# EAGLE board power-breakout-r1 (EAGLE 9.1.3)
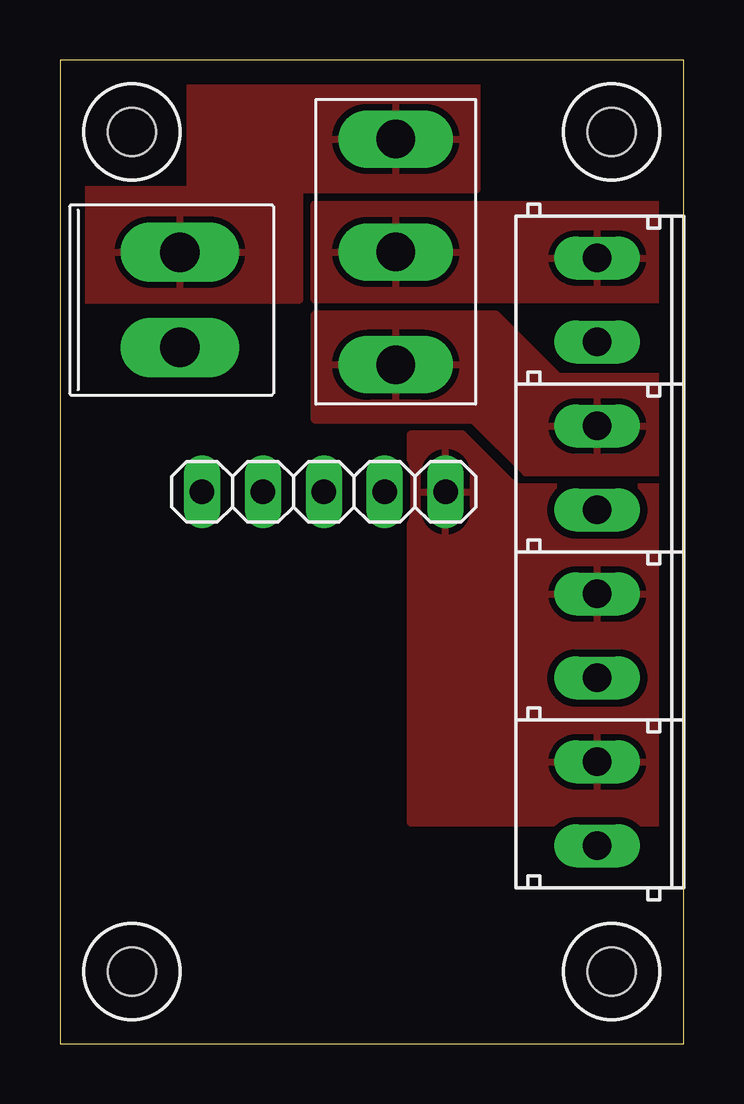
[diagram p0: board, top side]
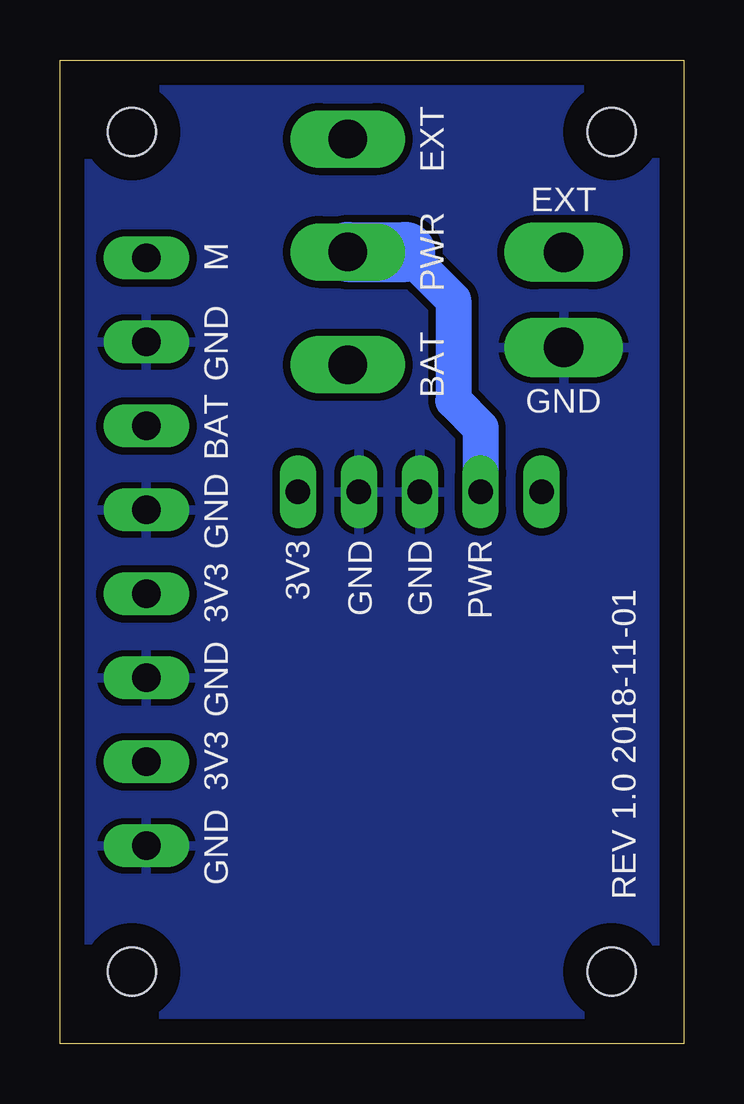
[diagram p1: board, bottom side, seen from below]

Size 26 x 41 mm. Coordinates in mm from the lower left corner, seen from the top.
Outline: 0,0 26,0 26,41 0,41 0,0
Copper layers (1*16): Top 0.035mm / dielectric 1.5mm / Bottom 0.035mm
Design rules "default": minimum track width 6mil, minimum drill 0.35mm, track to track 6mil, track to pad 6mil, pad to pad 6mil, via to via 6mil, smd to smd 6mil, copper to edge 40mil, drill to drill 6mil, minimum pad ring 10mil, minimum via ring 8mil, stop-mask expansion 4mil, vias tented up to drill 0mil, thermal gap 10mil
Holes 2 mm at 3,3 23,3 23,38 3,38

## Footprints (pad centres in the part's own frame; a part is rotated, then mirrored left to right if it is on the bottom)
1X05-CONNECTOR = drill 1.016 long: 1 -5.08,0; 2 -2.54,0; 3 0,0; 4 2.54,0; 5 5.08,0
WURTH_691103110002 = drill 1.2 long: 1 -1.75,-3.6; 2 1.75,-3.6
2_PINS,0.156_PITCH = drill 1.65 long: 1 0,1.98; 2 0,-1.98
APEM_GH39P0 = drill 1.6 long: P$1 0,4.7; P$2 0,0; P$3 0,-4.7

## Placement (x,y rotation side)
JP_3V3_REG  CON-1X5  [1X05-CONNECTOR]  11,23 0 top
JPWR_3V3_A  WURTH_691103110002  [WURTH_691103110002]  26,17 270 top
JPWR_3V3_B  WURTH_691103110002  [WURTH_691103110002]  26,10 270 top
JPWR_BATTERY  WURTH_691103110002  [WURTH_691103110002]  26,24 270 top
JPWR_EXTERNAL  JST_B2P-VH_1X2_10A  [2_PINS,0.156_PITCH]  5,31 0 top
JPWR_MOTORS  WURTH_691103110002  [WURTH_691103110002]  26,31 270 top
SW  APEM_GH39P0  [APEM_GH39P0]  14,33 180 top

## Library data of the parts
JP_3V3_REG = pin-headers
JPWR_3V3_A JPWR_3V3_B JPWR_BATTERY JPWR_EXTERNAL JPWR_MOTORS = connectors-power
SW = switches

## Nets
3V3: JP_3V3_REG.5 JPWR_3V3_A.1 JPWR_3V3_B.1
AGND: JP_3V3_REG.3 JP_3V3_REG.4 JPWR_3V3_A.2 JPWR_3V3_B.2 JPWR_BATTERY.2 JPWR_EXTERNAL.2 JPWR_MOTORS.2
EN: JP_3V3_REG.1
V_BAT: JPWR_BATTERY.1 SW.P$1
V_EXT: JPWR_EXTERNAL.1 SW.P$3
V_PWR: JP_3V3_REG.2 JPWR_MOTORS.1 SW.P$2

## Tracks (layer width: path | path; a pad name or v marks a point on that pad's centre or on a via)
3V3
  pour Top (isolate 0.3): 14.6,25.4 14.6,9.2 25,9.2 25,23.2 19,23.2 16.8,25.4
AGND
  pour Bottom (isolate 0.3): 1,40 25,40 25,1 1,1
V_BAT
  pour Top (isolate 0.3): 10.6,30.4 10.6,26.6 10.6,26.2 10.6,26 17.2,26 19.4,23.8 19.8,23.8 25,23.8 25,27.8 20.8,27.8 20.2,28.4 18.2,30.4
V_EXT
  pour Top (isolate 0.3): 1,31 10,31 10,35.6 17.4,35.6 17.4,40 5.4,40 5.4,35.6 1,35.6
V_PWR
  Bottom 1.5: 11.6,33 10.7,32.1 9.6,31 9.6,26.8 8.46,25.66 JP_3V3_REG.2
  Bottom 2.5: SW.P$2 11.6,33
  pour Top (isolate 0.3): 10.6,35 25,35 25,31 10.6,31

## Text on the board
bNames: EXT | EXT | PWR | M | GND | BAT | GND | BAT | GND | PWR | GND | GND | 3V3 | 3V3 | GND | 3V3 | GND | REV 1.0 2018-11-01